# EAGLE board amplifier-controller (EAGLE 7.6.0)
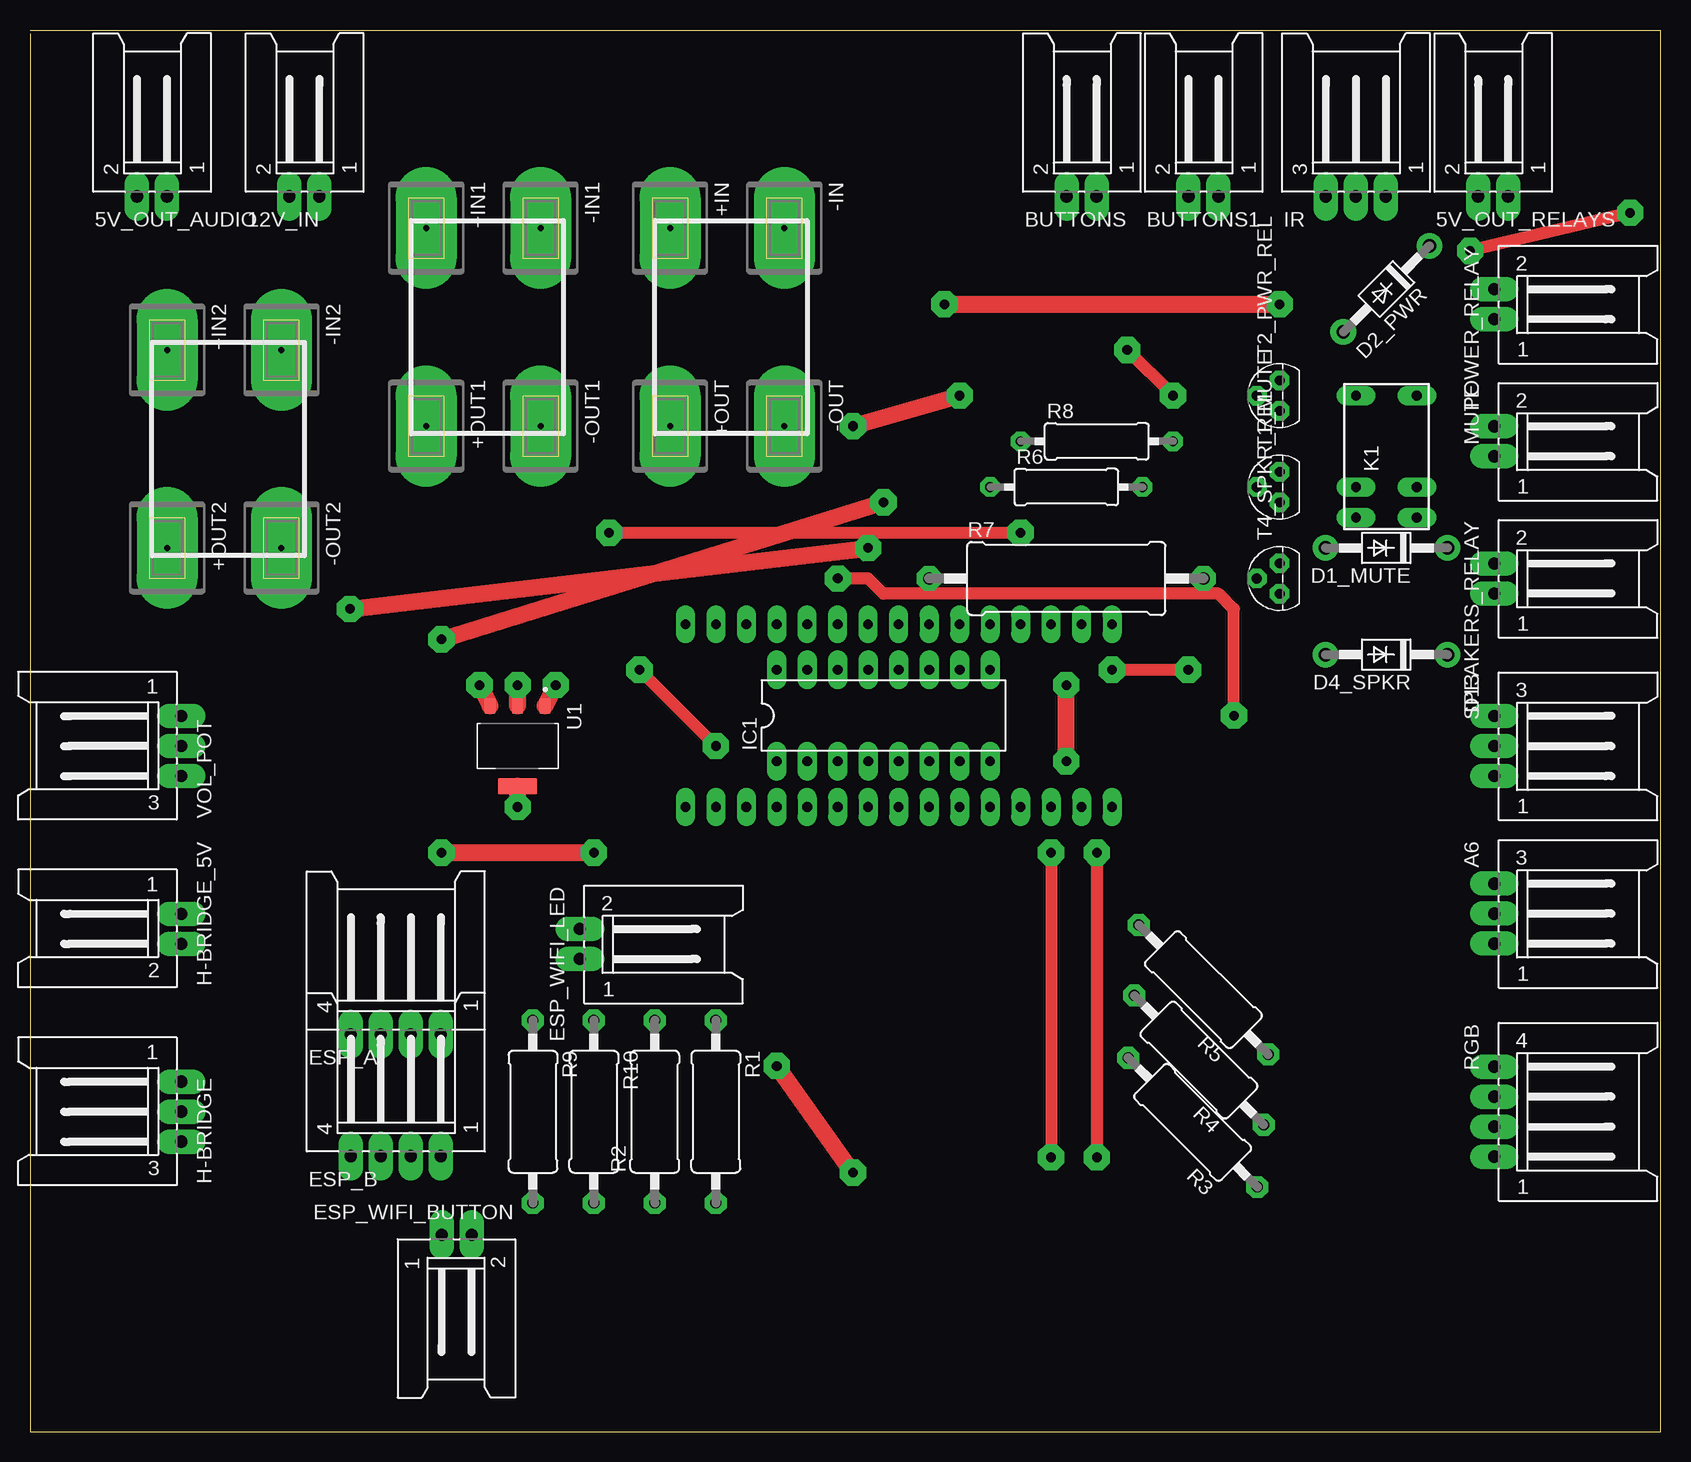
[diagram p0: board, top side]
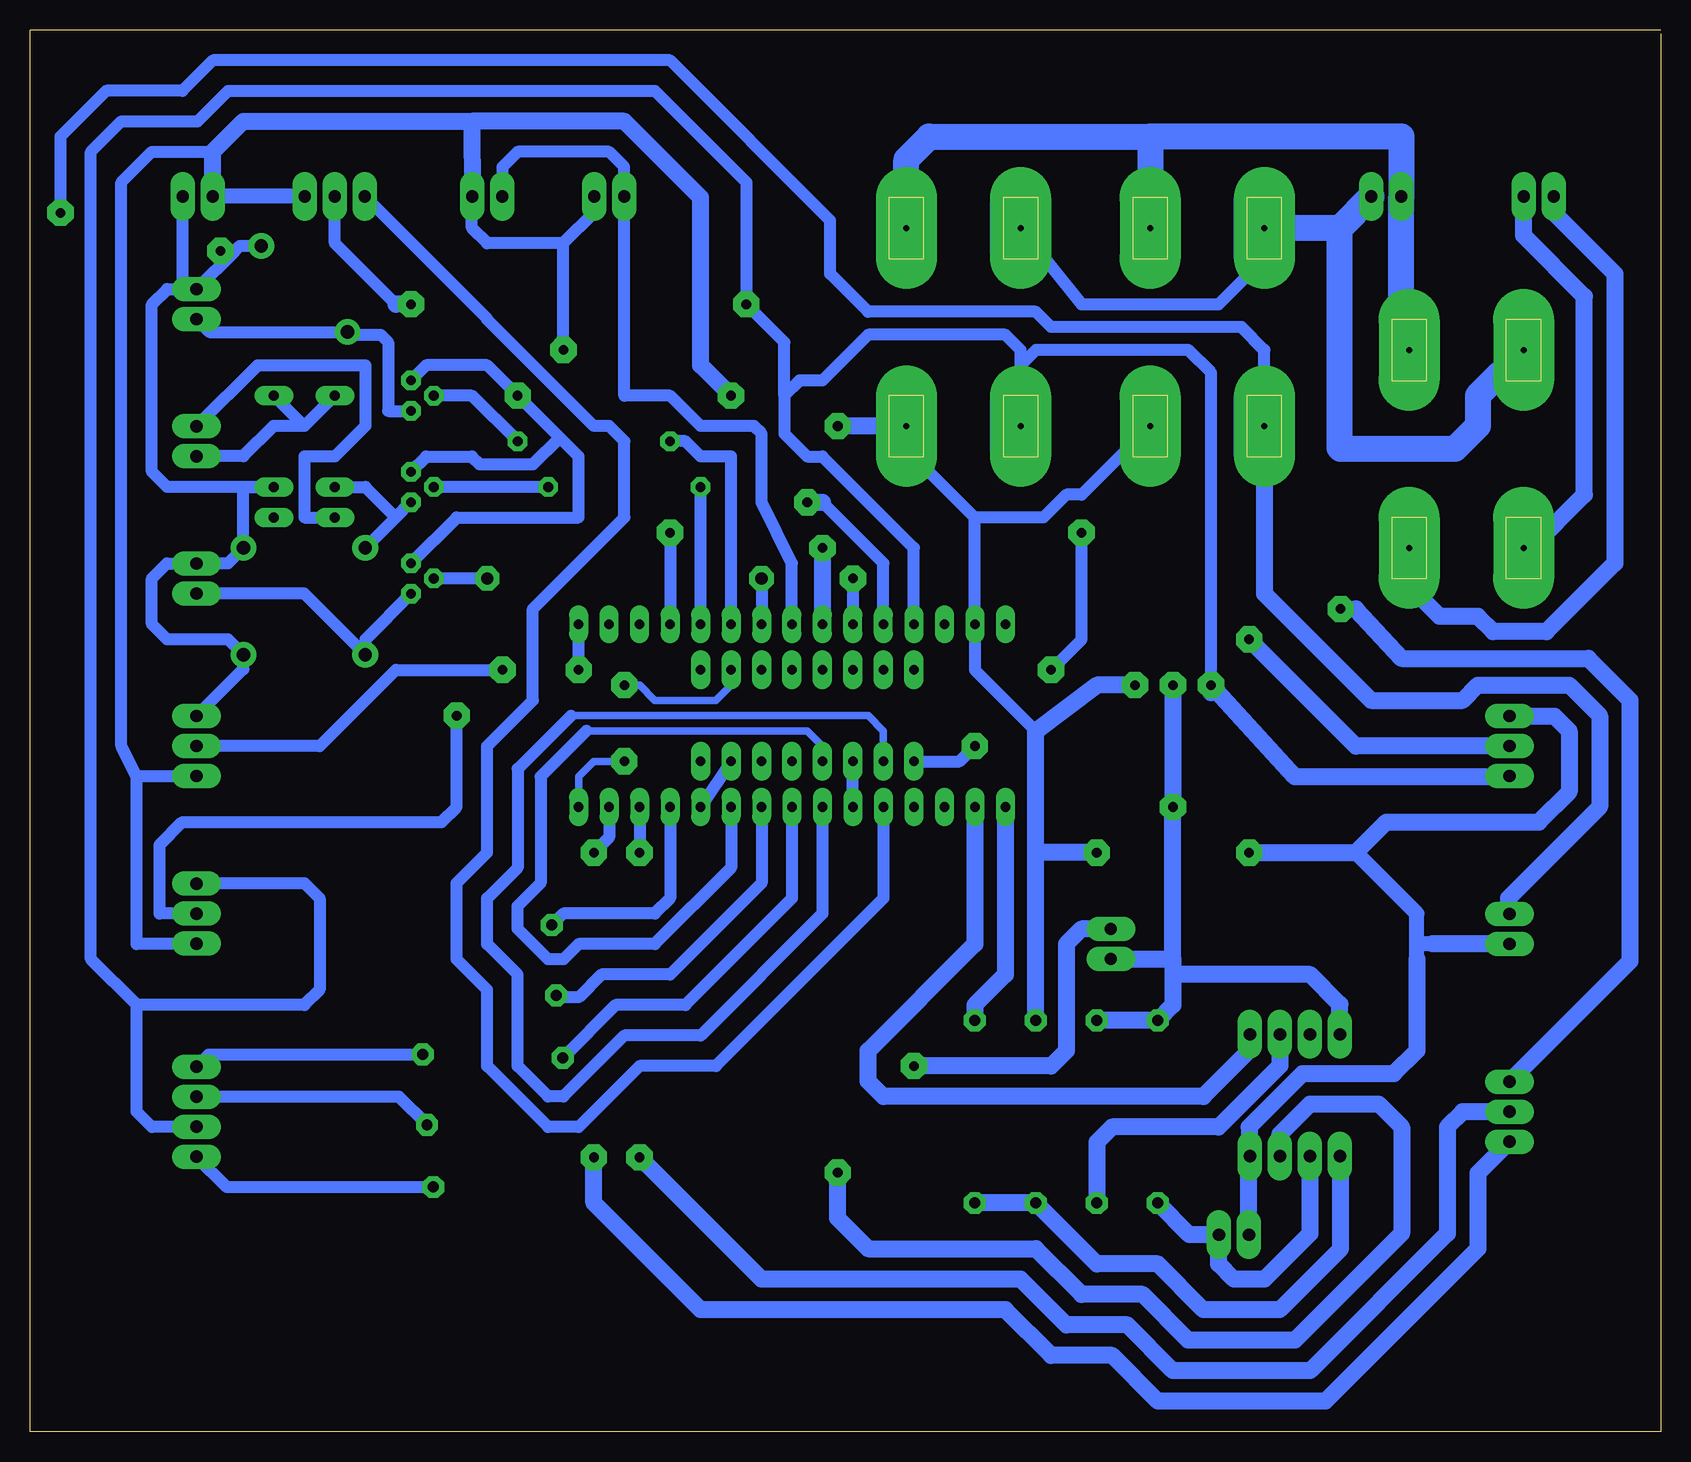
[diagram p1: board, bottom side, seen from below]

Size 135.89 x 116.84 mm. Coordinates in mm from the lower left corner, seen from the top.
Outline: 0,116.51 0,0 135.89,0 135.89,116.84 0,116.84
Copper layers (1*16): Top 0.035mm / dielectric 1.5mm / Bottom 0.035mm
Design rules "default *": minimum track width 10mil, minimum drill 24mil, track to track 8mil, track to pad 8mil, pad to pad 8mil, via to via 8mil, smd to smd 8mil, copper to edge 40mil, drill to drill 8mil, minimum pad ring 10mil, minimum via ring 8mil, stop-mask expansion 4mil, vias tented up to drill 0mil, thermal gap 10mil

## Footprints (pad centres in the part's own frame; a part is rotated, then mirrored left to right if it is on the bottom)
L02P = drill 1.016 long: 1 1.25,-6.25; 2 -1.25,-6.25
62221 = drill 0.5 pad 5.08 long: 1 0,0
L03P = drill 1.016 long: 1 2.5,-6.25; 2 0,-6.25; 3 -2.5,-6.25
DO41-10 = drill 1.118: A 5.08,0; C -5.08,0
L04P = drill 1.016 long: 1 3.75,-6.25; 2 1.25,-6.25; 3 -1.25,-6.25; 4 -3.75,-6.25
DIL16 = drill 0.813 long: 1 -8.89,-3.81; 2 -6.35,-3.81; 3 -3.81,-3.81; 4 -1.27,-3.81; 5 1.27,-3.81; 6 3.81,-3.81; 7 6.35,-3.81; 8 8.89,-3.81; 9 8.89,3.81; 10 6.35,3.81; 11 3.81,3.81; 12 1.27,3.81; 13 -1.27,3.81; 14 -3.81,3.81; 15 -6.35,3.81; 16 -8.89,3.81
G5V1 = drill 0.813 long: 1 -5.08,-2.54; 2 -2.54,-2.54; 5 5.08,-2.54; 6 5.08,2.54; 9 -2.54,2.54; 10 -5.08,2.54
0411/15 = drill 0.914 octagon: 1 -7.62,0; 2 7.62,0
0309/12 = drill 0.813 octagon: 1 -6.35,0; 2 6.35,0
0617/22 = drill 1.016 octagon: 1 -11.43,0; 2 11.43,0
TO92 = drill 0.813 octagon: 1 1.27,0; 2 0,1.905; 3 -1.27,0
SOT229P700X180-4N = smd 1.31 x 0.93: 1 -3.345,2.29; 2 -3.345,0; 3 -3.345,-2.29 | smd 1.31 x 3.24: 4 3.345,0
NANO = drill 0.8 long: 3.3V -10.16,24.13; 5V -10.16,-1.27; A0 -10.16,19.05; A1 -10.16,16.51; A2 -10.16,13.97; A3 -10.16,11.43; A4 -10.16,8.89; A5 -10.16,6.35; A6 -10.16,3.81; A7 -10.16,1.27; AREF -10.16,21.59; D2 5.08,1.27; D3 5.08,3.81; D4 5.08,6.35; D5 5.08,8.89; D6 5.08,11.43; D7 5.08,13.97; D8 5.08,16.51; D9 5.08,19.05; D10 5.08,21.59; D11 5.08,24.13; D12 5.08,26.67; D13 -10.16,26.67; GND -10.16,-6.35; GND1 5.08,-1.27; RAW -10.16,-8.89; RST -10.16,-3.81; RST1 5.08,-3.81; RX1 5.08,-6.35; TX0 5.08,-8.89

## Placement (x,y rotation side)
5V_OUT_AUDIO  [L02P]  10.16,109.22 0 top
5V_OUT_RELAYS  [L02P]  121.92,109.22 0 top
12V_IN  [L02P]  22.86,109.22 0 top
+IN  STEP_DOWN_1  [62221]  53.34,100.33 270 top
+IN1  STEP_DOWN_2  [62221]  33.02,100.33 270 top
+IN2  STEP_DOWN_3  [62221]  11.43,90.17 270 top
+OUT  STEP_DOWN_1  [62221]  53.34,83.82 270 top
+OUT1  STEP_DOWN_2  [62221]  33.02,83.82 270 top
+OUT2  STEP_DOWN_3  [62221]  11.43,73.66 270 top
-IN  STEP_DOWN_1  [62221]  62.87,100.33 270 top
-IN1  STEP_DOWN_2  [62221]  42.55,100.33 270 top
-IN2  STEP_DOWN_3  [62221]  20.95,90.17 270 top
-OUT  STEP_DOWN_1  [62221]  62.87,83.82 270 top
-OUT1  STEP_DOWN_2  [62221]  42.55,83.82 270 top
-OUT2  STEP_DOWN_3  [62221]  20.95,73.66 270 top
A6  [L03P]  128.27,43.18 270 top
BUTTONS  [L02P]  87.63,109.22 0 top
BUTTONS1  [L02P]  97.79,109.22 0 top
D1_MUTE  1N4004  [DO41-10]  113.03,73.66 180 top
D2_PWR  1N4004  [DO41-10]  113.03,95.25 225 top
D4_SPKR  1N4004  [DO41-10]  113.03,64.77 180 top
D13  [L03P]  128.27,57.15 270 top
ESP_A  [L04P]  30.48,39.37 0 top
ESP_B  [L04P]  30.48,29.21 0 top
ESP_WIFI_BUTTON  [L02P]  35.56,10.16 180 top
ESP_WIFI_LED  [L02P]  52.07,40.64 270 top
H-BRIDGE  [L03P]  6.35,26.67 90 top
H-BRIDGE_5V  [L02P]  6.35,41.91 90 top
IC1  4017N  [DIL16]  71.12,59.69 0 top
IR  [L03P]  110.49,109.22 0 top
K1  G5V1  [G5V1]  113.03,81.28 90 top
MUTE  [L02P]  128.27,82.55 270 top
POWER_RELAY  [L02P]  128.27,93.98 270 top
R1  1K  [0411/15]  57.15,26.67 270 top
R2  2K  [0411/15]  52.07,26.67 90 top
R3  140  [0411/15]  96.89,25.77 135 top
R4  90  [0411/15]  97.42,30.96 135 top
R5  90  [0411/15]  97.79,36.83 135 top
R6  10K  [0309/12]  86.36,78.74 0 top
R7  10K  [0617/22]  86.36,71.12 0 top
R8  10K  [0309/12]  88.9,82.55 0 top
R9  10k  [0411/15]  41.91,26.67 270 top
R10  10k  [0411/15]  46.99,26.67 270 top
RGB  [L04P]  128.27,26.67 270 top
SPEAKERS_RELAY  [L02P]  128.27,71.12 270 top
T1_MUTE  BC337  [TO92]  104.14,78.74 90 top
T2_PWR_REL  BC337  [TO92]  104.14,86.36 90 top
T4_SPKR_REL  BC337  [TO92]  104.14,71.12 90 top
U1  AMS1117  [SOT229P700X180-4N]  40.64,57.15 270 top
U$1  NANO  [NANO]  63.5,57.15 270 top
VOL_POT  [L03P]  6.35,57.15 90 top

## Library data of the parts
5V_OUT_AUDIO 5V_OUT_RELAYS 12V_IN A6 BUTTONS BUTTONS1 D13 ESP_A ESP_B ESP_WIFI_BUTTON ESP_WIFI_LED H-BRIDGE H-BRIDGE_5V IR MUTE POWER_RELAY RGB SPEAKERS_RELAY VOL_POT = con-amp-mt; OC_FARNELL: unknown; OC_NEWARK: unknown
+IN +IN1 +IN2 +OUT +OUT1 +OUT2 -IN -IN1 -IN2 -OUT -OUT1 -OUT2 = con-faston; MF: TYCO ELECTRONICS; MPN: 62221-1; OC_FARNELL: unknown; OC_NEWARK: 16H2318
D1_MUTE D2_PWR D4_SPKR = diode
IC1 = 40xx
K1 = relay; MPN: G5V-1-DC24; OC_FARNELL: 9949593; OC_NEWARK: 36M6377
R1-R6 R8-R10 = resistor
R7 = rcl
T1_MUTE T2_PWR_REL T4_SPKR_REL = transistor
U1 = AMS1117; AVAILABILITY: Unavailable; DESCRIPTION: 1A LOW DROPOUT VOLTAGE REGULATOR SOT-223; MF: Advanced Monolithic Systems; MP: AMS1117; PACKAGE: SOT-223 Seeed Technology; PRICE: None
U$1 = Arduino-clone_NO_ISA

## Nets
+3V3: ESP_A.4 ESP_WIFI_LED.1 R9.1 R10.1 U1.2 U1.4
+5V: +OUT.1 A6.3 IR.2 RGB.2 U1.3 U$1.5V VOL_POT.3
GND: 5V_OUT_RELAYS.2 -OUT1.1 -OUT.1 A6.1 BUTTONS1.1 BUTTONS.1 D13.1 ESP_B.1 ESP_WIFI_BUTTON.1 H-BRIDGE_5V.2 IR.1 R2.2 T1_MUTE.1 T2_PWR_REL.1 T4_SPKR_REL.1 U1.1 U$1.GND VOL_POT.1
N$1: ESP_B.4 R1.2 R2.1
N$2: R1.1 U$1.TX0
N$3: IR.3 U$1.D2
N$4: IC1.3 U$1.D3
N$5: IC1.2 U$1.D4
N$6: IC1.4 U$1.D7
N$7: IC1.7 U$1.D8
N$8: IC1.10 U$1.D12
N$9: IC1.1 U$1.A0
N$10: H-BRIDGE.1 U$1.A5
N$11: H-BRIDGE.2 U$1.D10
N$12: H-BRIDGE.3 U$1.D11
N$13: U$1.A7 VOL_POT.2
N$14: BUTTONS1.2 BUTTONS.2 U$1.A4
N$15: R3.1 RGB.1
N$16: R4.1 RGB.3
N$17: R5.1 RGB.4
N$18: R3.2 U$1.D5
N$19: R4.2 U$1.D6
N$20: R5.2 U$1.D9
N$21: D13.2 U$1.D13
N$22: A6.2 U$1.A6
N$23: ESP_B.3 ESP_WIFI_BUTTON.2 R9.2
N$24: ESP_A.1 U$1.RX1
N$25: D4_SPKR.A SPEAKERS_RELAY.1 T4_SPKR_REL.3
N$26: R7.2 T4_SPKR_REL.2
N$27: R6.2 T1_MUTE.2
N$28: R6.1 U$1.A1
N$29: R7.1 U$1.A3
N$30: D1_MUTE.A K1.9 T1_MUTE.3
N$31: R8.2 T2_PWR_REL.2
N$32: R8.1 U$1.A2
N$33: D2_PWR.A POWER_RELAY.1 T2_PWR_REL.3
N$34: ESP_A.2 R10.2
N$35: 12V_IN.2 -IN1.1 -IN2.1 -IN.1
N$36: ESP_B.2 ESP_WIFI_LED.2
N$37: 12V_IN.1 +IN1.1 +IN2.1 +IN.1
N$38: K1.5 K1.6 MUTE.1
N$39: K1.10 MUTE.2
N$40: 5V_OUT_AUDIO.1 +OUT2.1
N$41: 5V_OUT_AUDIO.2 -OUT2.1
N$43: 5V_OUT_RELAYS.1 +OUT1.1 D1_MUTE.C D2_PWR.C D4_SPKR.C D13.3 H-BRIDGE_5V.1 K1.2 POWER_RELAY.2 SPEAKERS_RELAY.2
VDD: IC1.16
VSS: IC1.8

## Tracks (layer width: path | path; a pad name or v marks a point on that pad's centre or on a via)
+3V3  (via drill 0.8 pad 2.18)
  Top 1.422: U1.2 v40.64,62.23 | v40.64,52.07 U1.4
  Bottom 1.422: 40.64,38.1 40.64,35.56 R9.1 R10.1 | ESP_A.4 26.73,35.62 29.21,38.1 40.64,38.1 | 40.64,39.37 40.64,38.1 | ESP_WIFI_LED.1 40.66,39.39 40.64,39.37 | 40.64,39.37 v40.64,52.07 v40.64,62.23
+5V  (via drill 0.8 pad 2.18)
  Top 1.422: v37.47,62.23 U1.3 | v76.2,93.98 v104.14,93.98
  Bottom 1.016: 53.34,87.63 53.34,88.9 | 53.34,88.9 53.34,90.17 54.61,91.44 66.04,91.44 69.85,87.63 71.75,87.63 73.03,86.36 | U$1.5V 62.23,73.66 69.85,81.28 71.12,81.28 73.03,83.19 73.03,86.36 | 73.03,86.36 73.03,90.81 v76.2,93.98 76.2,104.14 83.82,111.76 119.38,111.76 121.92,109.22 128.27,109.22 130.81,106.68 130.81,39.37 127,35.56 | 105.41,93.98 110.49,99.06 IR.2 | A6.3 121.98,45.72 113.03,45.72 111.76,44.45 111.76,36.83 113.03,35.56 127,35.56 | RGB.2 122.04,25.4 125.73,25.4 127,26.67 127,35.56 | v37.47,62.23 37.47,88.27 39.37,90.17 52.07,90.17 53.34,88.9
  Bottom 1.422: VOL_POT.3 12.64,54.61 30.48,54.61 v37.47,62.23 37.47,61.59 | +OUT.1 53.34,87.63 | v104.14,93.98 105.41,93.98
GND  (via drill 0.8 pad 2.18)
  Top 1.016: v95.25,86.36 v91.44,90.17
  Top 1.422: U1.1 v43.81,62.23 | v34.29,48.26 v46.99,48.26 | v68.58,83.82 v77.47,86.36
  Bottom 1.016: 52.07,58.42 57.15,63.5 U$1.GND 57.15,76.2 | 57.15,76.2 62.23,81.28 62.23,83.19 -OUT.1 | BUTTONS.1 88.88,101.62 91.44,99.06 | 91.44,99.06 97.79,99.06 99.06,100.33 99.06,102.95 BUTTONS1.1 | -OUT1.1 48.26,78.11 49.53,78.11 51.44,76.2 57.15,76.2 | D13.1 121.98,54.61 127,54.61 | T4_SPKR_REL.1 100.33,76.2 90.17,76.2 90.17,81.28 91.76,82.87 | 91.76,82.87 v95.25,86.36 97.79,88.9 102.87,88.9 T2_PWR_REL.1 | v91.44,90.17 91.44,99.06 | 127,54.61 128.27,57.15 128.27,104.14 125.73,106.68 120.65,106.68 | A6.1 122.06,40.64 127,40.64 127,54.61 | T1_MUTE.1 102.87,81.28 99.06,81.28 98.42,80.64 93.98,80.64 91.76,82.87
  Bottom 1.27: IR.1 5V_OUT_RELAYS.2 | 20.32,39.37 20.32,40.64 | 20.32,40.64 20.32,43.18 25.4,48.26 | 19.03,40.66 20.3,40.66 20.32,40.64
  Bottom 1.422: R2.2 52.07,48.26 | 52.07,48.26 52.07,58.42 46.99,62.23 v43.81,62.23 | v34.29,48.26 25.4,48.26 22.86,50.8 10.16,50.8 7.62,53.34 7.62,58.42 8.85,59.65 VOL_POT.1 | 20.32,39.37 20.32,31.79 20.3,31.77 22.23,29.84 29.84,29.84 34.29,25.4 34.29,23.02 ESP_B.1 34.31,22.88 ESP_WIFI_BUTTON.1 | H-BRIDGE_5V.2 19.03,40.66 | v46.99,48.26 52.07,48.26 | -OUT.1 v68.58,83.82 | v77.47,86.36 80.01,88.9 80.01,102.87 86.36,109.22 99.06,109.22 | 99.06,109.22 BUTTONS1.1 | 5V_OUT_RELAYS.2 120.65,106.68 118.11,109.22 99.06,109.22
N$1
  Bottom 1.422: ESP_B.4 26.67,22.9 26.67,15.24 31.75,10.16 38.1,10.16 41.91,13.97 46.99,13.97 R2.1 R1.2
N$2
  Bottom 1.422: U$1.TX0 54.61,38.1 57.15,35.56 R1.1
N$3
  Bottom 1.016: IR.3 97.79,92.77 97.79,92.71 88.9,83.82 87.63,83.82 86.36,82.55 86.36,76.2 93.98,68.58 93.98,60.96 97.79,57.15 97.79,48.26 100.33,45.72 100.33,39.37 97.79,36.83 97.79,30.48 92.71,25.4 90.17,25.4 85.09,30.48 78.74,30.48 64.77,44.45 U$1.D2
N$4
  Bottom 1.016: U$1.D3 IC1.3
N$5
  Bottom 0.61: IC1.2 64.77,58.42 66.04,59.69 90.81,59.69
  Bottom 1.016: 90.81,59.69 95.25,55.24 95.25,46.99 97.79,44.45 97.79,40.64 95.25,38.1 95.25,30.48 92.71,27.94 91.44,27.94 86.36,33.02 80.01,33.02 69.85,43.18 U$1.D4
N$6
  Bottom 0.61: IC1.4 69.85,57.15 71.12,58.42 89.53,58.42
  Bottom 1.016: 89.53,58.42 93.34,54.61 93.34,45.72 95.25,43.81 95.25,41.91 92.71,39.37 91.44,39.37 90.17,40.64 83.82,40.64 77.47,46.99 U$1.D7
N$7
  Bottom 1.016: IC1.7 U$1.D8
N$8  (via drill 0.8 pad 2.18)
  Top 1.422: v86.36,55.88 v86.36,62.23
  Bottom 0.61: IC1.10 77.47,62.23 78.74,60.96 83.82,60.96 85.09,62.23 v86.36,62.23 | v86.36,55.88 88.9,55.88 90.17,54.61 U$1.D12
N$9  (via drill 0.8 pad 2.18)
  Top 1.016: v57.15,57.15 v50.8,63.5 | v48.26,74.93 v82.55,74.93
  Bottom 1.016: IC1.1 58.42,55.88 v57.15,57.15 | v50.8,63.5 48.26,66.04 v48.26,74.93 | v82.55,74.93 U$1.A0
N$10  (via drill 0.8 pad 2.18)
  Top 1.422: v26.67,68.58 v69.85,73.66
  Bottom 1.422: v26.67,68.58 25.4,68.58 21.59,64.45 6.03,64.45 2.54,60.96 2.54,39.23 H-BRIDGE.1 | v69.85,73.66 U$1.A5
N$11  (via drill 0.8 pad 2.18)
  Top 1.016: v85.09,48.26 v85.09,22.86
  Bottom 1.016: U$1.D10 v85.09,48.26
  Bottom 1.422: v85.09,22.86 74.93,12.7 53.34,12.7 49.53,8.89 44.45,8.89 40.64,5.08 29.21,5.08 17.78,16.51 17.78,25.4 16.51,26.67 H-BRIDGE.2
N$12  (via drill 0.8 pad 2.18)
  Top 1.016: v88.9,48.26 v88.9,22.86
  Bottom 1.016: U$1.D11 87.63,49.53 v88.9,48.26
  Bottom 1.422: v88.9,22.86 88.9,19.05 80.01,10.16 54.61,10.16 50.8,6.35 45.72,6.35 41.91,2.54 27.94,2.54 15.24,15.24 15.24,21.53 H-BRIDGE.3
N$13  (via drill 0.8 pad 2.18)
  Top 1.422: v34.29,66.04 v71.12,77.47
  Bottom 1.016: U$1.A7 64.77,72.39 69.85,77.47
  Bottom 1.422: VOL_POT.2 25.4,57.15 v34.29,66.04 | v71.12,77.47 69.85,77.47
N$14
  Bottom 1.016: U$1.A4 72.39,72.39 74.93,77.47 74.93,83.19 75.56,83.82 80.01,83.82 82.55,86.36 86.36,86.36 86.36,102.95 BUTTONS.2 86.38,105.43 87.63,106.68 95.25,106.68 96.52,105.41 96.52,102.99 BUTTONS1.2
N$15
  Bottom 1.016: RGB.1 119.48,20.38 R3.1
N$16
  Bottom 1.016: R4.1 105.15,27.92 RGB.3
N$17
  Bottom 1.016: RGB.4 121,31.44 R5.1
N$18
  Bottom 1.016: U$1.D5 72.39,44.45 81.28,35.56 87.1,35.56 R3.2
N$19
  Bottom 1.016: U$1.D6 74.93,45.72 82.55,38.1 88.27,38.1 90.17,36.2 91.88,36.2 R4.2
N$20
  Bottom 1.016: U$1.D9 82.55,44.45 83.82,43.18 91.44,43.18 R5.2
N$21  (via drill 0.8 pad 2.18)
  Top 1.016: v96.52,63.5 v90.17,63.5
  Bottom 1.016: v96.52,63.5 105.41,63.5 111.76,57.15 D13.2 | v90.17,63.5 U$1.D13
N$22  (via drill 0.8 pad 2.18)
  Top 1.016: v100.33,59.69 100.33,68.58 99.06,69.85 71.12,69.85 69.85,71.12 v67.31,71.12
  Bottom 1.016: A6.2 125.09,43.18 125.09,48.9 123.19,50.8 101.6,50.8 100.33,52.07 v100.33,59.69 | v67.31,71.12 U$1.A6
N$23
  Bottom 1.422: ESP_B.3 29.21,22.94 29.21,16.51 33.02,12.7 35.56,12.7 36.83,13.97 36.83,16.39 ESP_WIFI_BUTTON.2 39.27,16.41 R9.2
N$24
  Bottom 1.422: ESP_A.1 34.23,31.81 38.1,27.94 64.77,27.94 66.04,29.21 66.04,31.75 57.15,40.64 U$1.RX1
N$25
  Bottom 1.016: T4_SPKR_REL.3 107.95,66.04 D4_SPKR.A 113.05,69.87 SPEAKERS_RELAY.1
N$26
  Bottom 1.016: R7.2 T4_SPKR_REL.2
N$27
  Bottom 1.016: R6.2 T1_MUTE.2
N$28
  Bottom 1.016: U$1.A1 R6.1
N$29
  Bottom 1.016: R7.1 U$1.A3
N$30
  Bottom 1.016: D1_MUTE.A 105.41,76.2 | 105.41,76.2 T1_MUTE.3 | K1.9 107.95,78.74 105.41,76.2
N$31
  Bottom 1.016: R8.2 99.06,86.36 T2_PWR_REL.2
N$32
  Bottom 1.016: U$1.A2 77.47,81.28 80.01,81.28 81.28,82.55 R8.1
N$33
  Bottom 1.016: POWER_RELAY.1 120.95,91.66 D2_PWR.A 109.22,91.44 106.68,91.44 106.05,90.81 106.05,85.09 T2_PWR_REL.3
N$34
  Bottom 1.422: ESP_A.2 31.73,30.5 36.83,25.4 45.72,25.4 46.99,24.13 R10.2
N$35
  Bottom 2.184: 42.55,107.95 -IN1.1 | 42.55,107.95 60.96,107.95 62.87,106.05 -IN.1 | 42.55,107.95 21.59,107.95 21.59,102.99 12V_IN.2 21.61,90.83 -IN2.1
N$36  (via drill 0.8 pad 2.18)
  Top 1.422: v68.58,21.59 v62.23,30.48
  Bottom 1.422: ESP_B.2 31.73,24.79 29.21,27.3 23.5,27.3 21.59,25.4 21.59,16.51 30.48,7.62 39.37,7.62 43.18,11.43 48.26,11.43 52.07,15.24 66.04,15.24 68.58,17.78 v68.58,21.59 | ESP_WIFI_LED.2 48.28,41.89 49.53,40.64 49.53,31.75 50.8,30.48 v62.23,30.48
N$37
  Bottom 1.016: +IN.1 48.26,93.98 36.83,93.98 33.02,97.79 +IN1.1
  Bottom 2.184: 12V_IN.1 26.75,100.33 | 26.75,100.33 +IN1.1 | +IN2.1 15.24,86.36 15.24,83.82 17.14,81.92 26.67,81.92 26.75,82 26.75,100.33
N$38
  Bottom 1.016: K1.6 113.03,83.82 | MUTE.1 118.11,81.3 115.59,83.82 113.03,83.82 | K1.5 113.03,83.82
N$39
  Bottom 1.016: MUTE.2 116.92,88.9 107.95,88.9 107.95,83.82 110.49,81.28 113.03,81.28 113.03,76.2 K1.10
N$40
  Bottom 1.422: +OUT2.1 10.79,73.66 6.35,78.11 6.35,94.61 11.43,99.69 11.43,102.95 5V_OUT_AUDIO.1
N$41
  Bottom 1.422: -OUT2.1 20.32,73.03 20.32,69.85 18.41,67.94 15.24,67.94 13.97,66.67 9.53,66.67 3.81,72.39 3.81,96.52 8.91,101.62 5V_OUT_AUDIO.2
N$43  (via drill 0.8 pad 2.18)
  Top 1.016: v133.35,101.6 v120.02,98.42
  Bottom 1.016: 123.19,95.25 124.46,95.25 125.73,93.98 125.73,80.01 124.46,78.74 K1.2 118.11,78.74 D1_MUTE.C 119.4,72.37 SPEAKERS_RELAY.2 124.48,72.37 125.73,71.12 125.73,67.31 124.46,66.04 119.38,66.04 D4_SPKR.C 118.11,63.56 D13.3 | 123.19,95.25 123.17,95.23 POWER_RELAY.2 118.78,98.47 | 123.19,95.25 123.17,95.27 5V_OUT_RELAYS.1 | 118.78,98.47 118.41,98.84 D2_PWR.C | +OUT1.1 33.02,90.17 34.92,92.08 50.8,92.08 52.07,93.34 66.04,93.34 69.22,96.52 69.22,100.97 82.55,114.3 120.65,114.3 123.19,111.76 129.54,111.76 133.35,107.95 v133.35,101.6 | v120.02,98.42 118.78,98.47
  Bottom 1.422: +OUT1.1 33.02,69.85 24.13,60.96 16.51,60.96 15.24,62.23 7.62,62.23 5.08,59.69 5.08,52.07 12.7,44.45 12.7,43.26 H-BRIDGE_5V.1
(copper drawn outside any net)
  shapes: Bottom area x10